# Altium PCB FS.PcbDoc
Units mil, origin at the board's own origin, x right, y up, seen from the top; angles counter-clockwise.
Board outline 5207.9 x 2647.9 mil, 2 copper layers (Top Layer, Bottom Layer); 27 components, 45 nets, 193 pads, 36 vias.
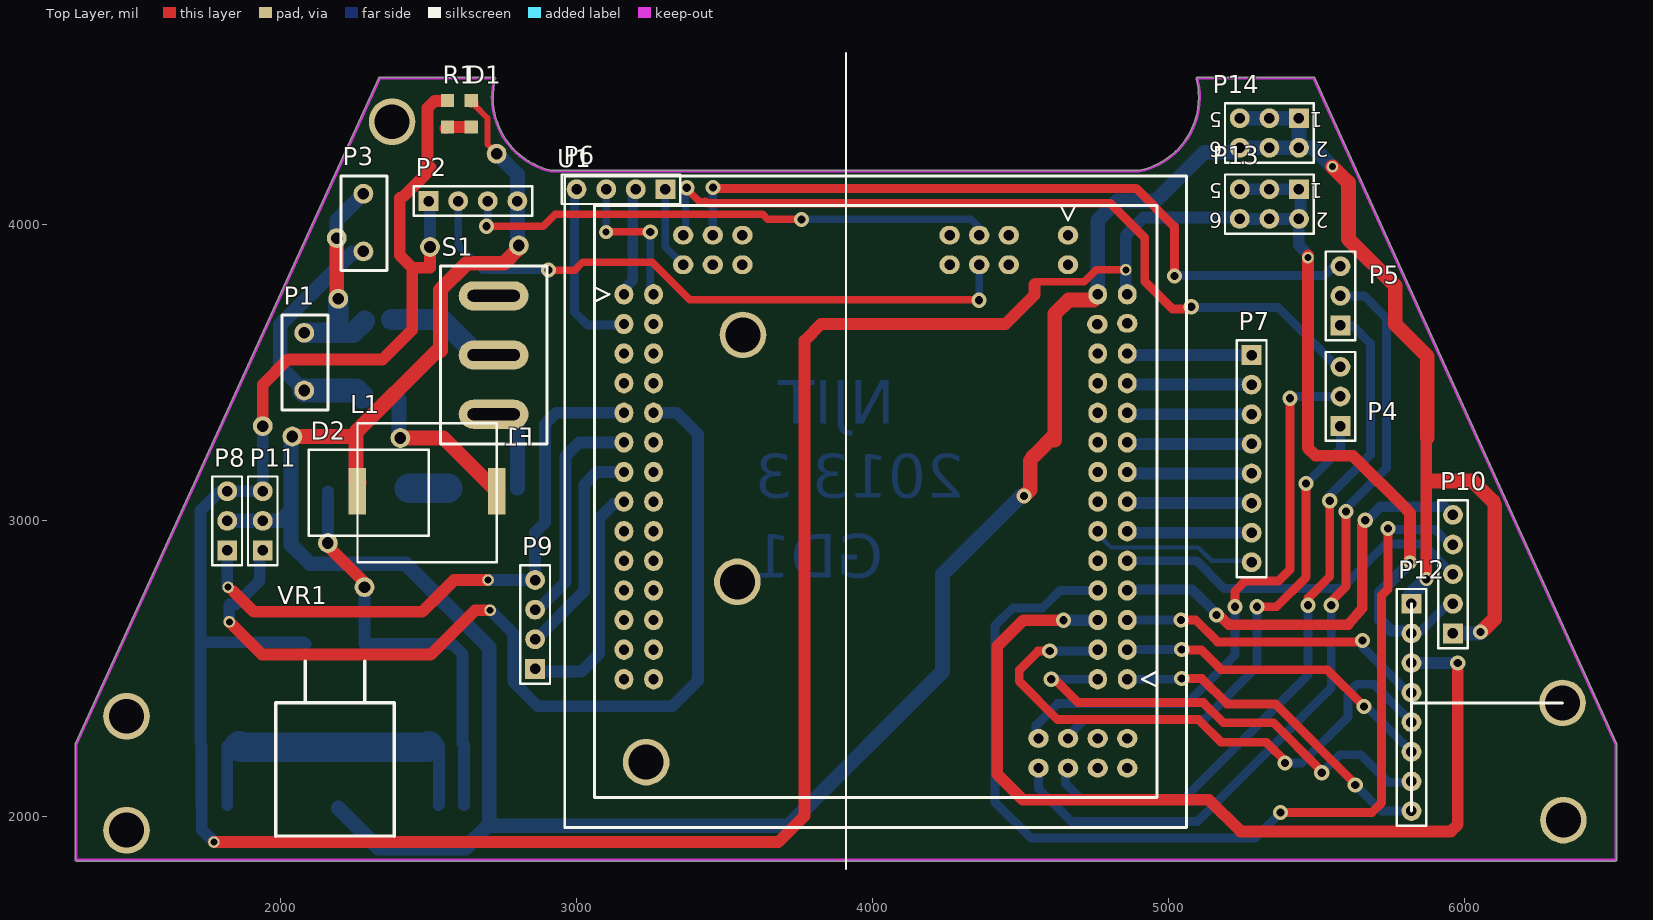
[diagram p0: Top Layer view]
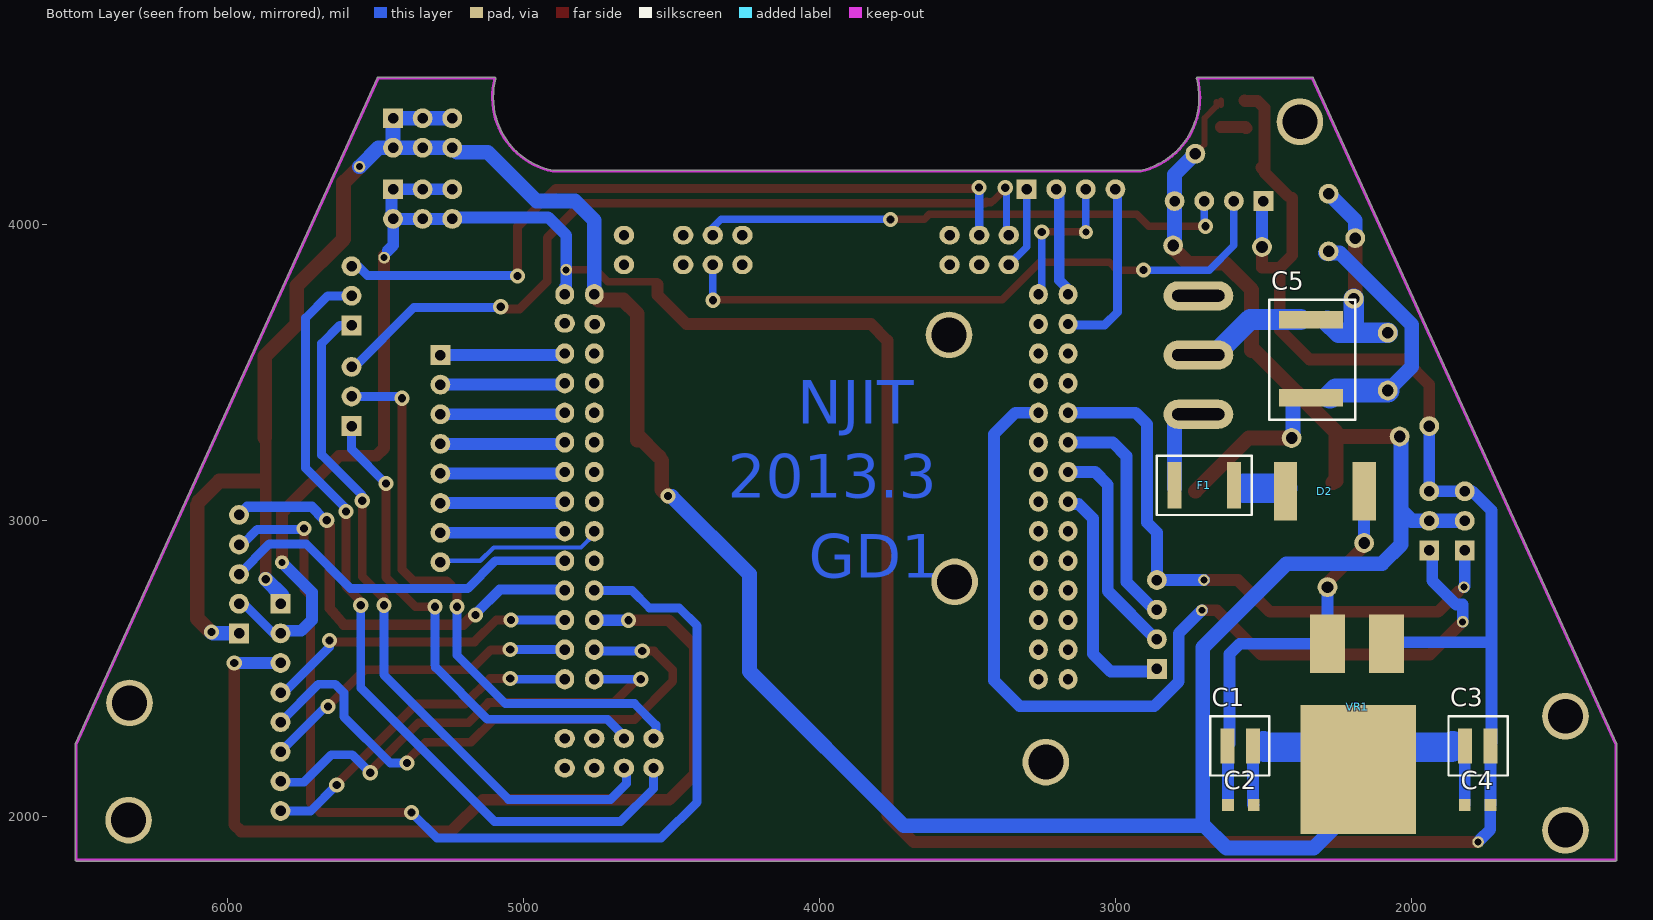
[diagram p1: Bottom Layer view, seen from below]

## Layer stack, top to bottom
Top Layer: signal copper 1.4
Dielectric: dielectric 12.6, FR-4, Dk 4.8
Bottom Layer: signal copper 1.4

## Board outline
1310,1851.05 cw(c1310,1855) 1306.05,1855 1306.05,2245 cw(c1310,2245) 1306.4,2246.64 2331.4,4496.64 cw(c2335,4495) 2335,4498.95 2721.67,4498.95 cw(c2721.67,4495) 2724.74,4497.49 cw(c2722.26,4494.41) 2726.21,4494.41 cw(c2722.26,4494.41) 2726.08,4493.42 ccw(c2970,4430) 2915.43,4183.95 4899.61,4183.95 ccw(c4850,4430) 5101,4430 ccw(c4850,4430) 5092.93,4493.15 cw(c5096.75,4494.15) 5096.75,4498.11 5487.56,4498.11 cw(c5490,4495) 5493.6,4496.63 6513.59,2246.64 6513.6,2246.63 6513.59,2246.64 cw(c6510,2245) 6513.95,2245 6513.95,1855 cw(c6510,1855) 6510,1851.05

## Design rules (kind name [scope] priority, off if disabled: settings)
Clearance [All] p1: gap=10
ComponentClearance [All] p1: gap=10 collisioncheckmode=3 verticalgap=0
PolygonConnect [All] p1: connectstyle=Relief reliefconductorwidth=10 reliefentries=4 polygonreliefangle="90 Angle"
RoutingVias [All] p1: holewidth=28 width=50 viastyle="Through Hole" minholewidth=28 minwidth=50 maxholewidth=28 maxwidth=50
SolderMaskExpansion [All] p1: expansion=4
TestPointUsage [All] p1: valid=0 allowmultiple=FALSE
Testpoint [All] p1: side=15 testpointundercomponent=TRUE minsize=40 maxsize=100 preferedsize=60 minholesize=0 maxholesize=40 preferedholesize=32 testpointgrid=1 style=1023 order=0123456789
Width [All] p1: maxlimit=100 minlimit=10 preferedwidth=40
18 further rules are at their usual default settings.

## Components (designator, comment, footprint, x,y, rotation, side; value= is the part's Value field where it differs from the comment)
C1 "Cap" 22uF钽电容 2580,2240 r0 bottom
C2 "Cap" 10uF的钽电容 2533,2040 r0 bottom
C3 "Cap" 22uF钽电容 1775,2240 r180 bottom
C4 "Cap" 10uF的钽电容 1820,2040 r180 bottom
C5 "Cap" 47UF钽电容 2340,3416.22 r90 bottom
D1 "LED0" 0805 2644,4330 r90 top
D2 "2A 60V" 470uF钽电容 2425.75,3100 r180 top
F1 "Fuse 1" FUSE 2800,3120 r180 bottom
L1 "Inductor" INDUCTOR 2730,3100 r180 top
P1 "Header 2H" 端子 2080,3530 r90 top
P2 "Header 4" HDR1X4 2500,4080 r0 top
P3 "Header 2" 端子 2280,4000 r90 top
P4 "Header 3" HDR1X3 5580,3320 r90 top
P5 "Header 3" HDR1X3 5580,3660 r90 top
P6 "Header 4" HDR1X4 3300,4120 r180 top
P7 "Header 8" HDR1X8 5280,3560 r270 top
P8 "Header 3" HDR1X3 1820,2900 r90 top
P9 "Header 4" HDR1X4 2860,2500 r90 top
P10 "Header 5" HDR1X5 5960,2620 r90 top
P11 "Header 3" HDR1X3 1940,2900 r90 top
P12 "Header 8" HDR1X8 5820,2720 r270 top
P13 "Header 3X2" HDR2X3 5440,4120 r180 top
P14 "Header 3X2" HDR2X3 5440,4360 r180 top
R1 "Res2" 0805 2564,4420 r270 top
S1 "SW-SPDT" Rockey_Switch 2720,3560 r270 top
U1 "MC9S12XS128" XS128A 3980,3060 r270 top
VR1 "LM2940S" LM2940 2083.94,2585 r0 top

## Footprints (in the part's own frame and the unit in brackets; to place one, negate y for a bottom-side part, rotate by r counter-clockwise, add the part's x,y. Pads: shape width x height; smd on the part's side, far side on the other; paste and mask are expansions set on the pad)
10uF的钽电容 [mm]
  rect 1x1 smd: 1(0,0) 2(2.21,0)
22uF钽电容 [mm]
  rect 1.2x3 smd: 1(-1.143,0) 2(1.067,0)
  silkscreen extent -2.54,-2.54 2.54,2.54
47UF钽电容 [mm]
  rect 1.5x5.5 smd: 1(0,0) 2(6.7,0)
  silkscreen extent -1.91,-3.81 8.38,3.56
470uF钽电容 [mm]
  rect 2x5 smd far side: 1(0,0) 2(6.75,0)
  silkscreen extent -1.91,-3.56 8.38,3.81
0805 [mil]
  rect 45x45 smd: 1(0,0) 2(90,0)
FUSE [mm]
  rect 1.2x4 smd: 1(0,0) 2(5.08,0)
  silkscreen extent -1.52,-2.54 6.6,2.54
HDR1X3 [mm] "Connector; Header; 3 Position"
  rect 1.7x1.7 hole 0.9: 1(0,0)
  round 1.7 hole 0.9: 2(2.54,0) 3(5.08,0)
  silkscreen extent -1.27,-1.27 6.35,1.27
HDR1X4 [mm] "Connector; Header; 4 Position"
  rect 1.7x1.7 hole 0.9: 1(0,0)
  round 1.7 hole 0.9: 2(2.54,0) 3(5.08,0) 4(7.62,0)
  silkscreen extent -1.27,-1.27 8.89,1.27
HDR1X5 [mm] "Connector; Header; 5 Position"
  rect 1.7x1.7 hole 0.9: 1(0,0)
  round 1.7 hole 0.9: 2(2.54,0) 3(5.08,0) 4(7.62,0) 5(10.16,0)
  silkscreen extent -1.27,-1.27 11.43,1.27
HDR1X8 [mm] "Connector; Header; 8 Position"
  rect 1.7x1.7 hole 0.9: 1(0,0)
  round 1.7 hole 0.9: 2(2.54,0) 3(5.08,0) 4(7.62,0) 5(10.16,0) 6(12.7,0) 7(15.24,0) 8(17.78,0)
  silkscreen extent -1.27,-1.27 19.05,1.27
HDR2X3 [mm] "Connector; Header; 3x2 Position"
  rect 1.7x1.7 hole 0.9: 1(0,0)
  round 1.7 hole 0.9: 2(0,2.54) 3(2.54,0) 4(2.54,2.54) 5(5.08,0) 6(5.08,2.54)
  silkscreen extent -1.27,-1.27 6.35,3.81
INDUCTOR [mm]
  rect 1.5x4 smd: 1(0,0) 2(11.938,0)
  silkscreen extent 0,-5.84 11.94,6.1
LM2940 [mm]
  rect 3x5 smd far side: 1(5.08,0) 3(0,0)
  rect 9.924x11.07 smd far side: 2(2.44,-10.795)
  silkscreen extent -2.54,-16.51 7.62,-1.52
Rockey_Switch [mm]
  oval 2.5x6 hole 1 slot 4.5 at 90 deg: 1(-5.08,0) 2(0,0) 3(5.08,0)
  silkscreen extent -7.62,-4.57 7.62,4.57
XS128A [mil]
  oval 68.9x62.99 hole 35: 1(-705,-820) 2(-705,-720) 3(-605,-820) 4(-605,-720) 6(-505,-720) 8(-405,-720) 9(-305,-820) 10(-305,-720) 11(-205,-820) 12(-205,-720) 13(-105,-820) 14(-105,-720) 15(-5,-820) 16(-5,-720) 17(95,-720) 18(95,-820) 19(195,-820) 20(195,-720) 21(295,-820) 22(295,-720) 23(395,-820) 24(395,-720) 25(495,-820) 26(495,-720) 27(595,-820) 28(595,-720) 45(595,880) 46(595,780) 47(495,880) 48(495,780) 49(395,880) 50(395,780) 51(295,880) 52(295,780) 53(195,880) 54(195,780) 55(95,880) 56(95,780) 57(-5,880) 58(-5,780) 59(-105,880) 60(-105,780) 61(-205,880) 62(-205,780) 63(-305,880) 64(-305,780) 65(-405,880) 66(-405,780) 67(-505,880) 68(-505,780) 69(-705,880) 70(-705,780) " 5"(-505,-820) " 7"(-405,-820)
  oval 62.99x68.9 hole 35: 37(895,580) 38(795,580) 39(895,680) 40(795,680) 41(895,780) 42(795,780) 43(895,880) 44(795,880) 71(-805,480) 72(-905,480) 73(-805,380) 74(-905,380) 75(-805,280) 76(-905,280) 89(-805,-420) 90(-905,-520) 91(-805,-520) 92(-905,-620) 93(-805,-620) 201(-905,680) 202(-805,680) 223(-905,-420) 325(-607,880) 326(-604,779)
  silkscreen extent -1105,-1020 1095,1080
端子 [mm]
  round 1.7 hole 1: 1(-2.286,0) 2(2.667,0)
  silkscreen extent -3.94,-2.03 4.19,1.91

## Part data
C1 C2 C3 C4 C5: "Capacitor"
D1: "Typical INFRARED GaAs LED"
D2: library part "Diode 1N4934", "1 Amp Fast Recovery Rectifier"
F1: "2A"
P1: "Header, 2-Pin, Right Angle"
P2 P6 P9: "Header, 4-Pin"
P3: "Header, 2-Pin"
P4 P5 P8 P11: "Header, 3-Pin"
P7 P12: "Header, 8-Pin"
P10: "Header, 5-Pin"
P13 P14: library part "Header 3", "Header, 3-Pin"
R1: "Resistor"
S1: "SPDT Subminiature Toggle Switch, Right Angle Mounting, Vertical Actuation"
VR1: library part "Volt Reg", "Voltage Regulator"

## Free pads (board coordinates)
  round 39.37 hole 23.62: 0(1775,1915) 2(4855,3848) 37(2701,2800) 38(2708,2698) 39(1823,2776) 40(1827,2659) 43(5553,4196) 44(5470,3889)
  round 66.93 hole 39.37: 0(1940,3320) 0(2040,3285) 1(2405,3280) 1(2505,3925) 2(2160,2925) 2(2730,4240) 3(2283.94,2776.06) 3(2805,3930) 4(2195,3750) 5(2190,3955)
  round 47.24 hole 23.62: 0(3100,3975) 42(5815,2860)
  round 157.48 hole 118.11: 46(2377,4348) 47(1480,1955) 49(3235,2185) 50(1480,2340) 51(3543,2794) 51(3562,3628) 51(6330,2385) 51(6333,1989)

## Via types
v1: diameter 51.18, hole 27.56, Top Layer to Bottom Layer, 33 vias
v2: diameter 51.18, hole 27.6, Top Layer to Bottom Layer, 2 vias
v3: diameter 47.24, hole 27.6, Top Layer to Bottom Layer, 1 vias

## Nets (pads, with @x,y where several pads share a name; then routed paths per layer and width w, separated by ;. In a path a pad name is that pad's centre, name@x,y a point inside that pad or via, vN(x,y) a via of type N, cw(c..) or ccw(c..) an arc to the next point about the centre after c; other vN are vias at no path point)
5V: C3.2 C4.2 P2.1 P8.3 P10.2 P11.3 P12.2 P13.1 P13.2 P13.3 P13.4 P13.5 P13.6 pad.0@1775,1915 pad.0@1940,3320 pad.1@2505,3925 pad.2@4855,3848 pad.42 pad.44 R1.1 U1.69 VR1.3 | length 11671.7
  Top Layer w25: 4547,3808 4715,3808 4755,3848 pad.2@4855,3848
  Top Layer w40: pad.0@1775,1915 3681,1915 3770,2004 3770,3609 3826,3665 4449,3665 4547,3763 4547,3798 ; pad.0@1940,3320 1940,3460 2025,3545 2345,3545 2445,3645 2445,3845 2455,3855 ; 2403,4090 2403,3897 2445,3855 2455,3855 ; 2416,4097 2497,4178 2497,4183 ; pad.1@2505,3915 2505,3855 2455,3855 ; 2507,4193 2497,4183 ; R1.1 2562,4418 2520,4418 2497,4395 2497,4183 ; pad.44@5470,3896 pad.44 5470,3246 5496,3220 5622,3220 5807,3035 ; pad.42 5815,3027
  Bottom Layer w30: P12.2 5844,2620 5952,2728 P10.2@5956,2732
  Bottom Layer w40: C3.2@1730,2250 1730,3035 1795,3100 P8.3 P11.3 pad.0@1940,3310 ; C4.2 C3.2 ; C4.2@1734,2046 1734,2040 1734,1957 pad.0@1769.01,1921.99 ; 1740,2590 2078.94,2590 VR1.3 ; P2.1 2505,4075 pad.1@2505,3925 ; U1.69@4860,3760 U1.69 U1.69@4860,3769 ; U1.69@4860,3790 U1.69@4860,3769 ; P13.6@5235,4025 4916,4025 4855,3964 4855,3848 4855,3774 U1.69@4860,3769 ; P13.6 P13.4 P13.2 P13.2@5445,4025 ; P13.5 P13.3 P13.1 ; P13.1@5445,4115 P13.2@5445,4025 ; 5457,3913 5439,3931 5439,4014 5442.5,4017.5 5445,4020 P13.2@5445,4025 ; P12.2@5814,2629 5750,2629 5714,2665 5714,2759 pad.42 pad.42@5817,2862
7.2V: C5.2 P1.2 P3.2 pad.4 pad.5 S1.2 | length 1079.1
  Top Layer w50: pad.5 2190,3755 pad.4 ; P3.2@2278.97,4106.03 P3.2@2280,4107.05
  Bottom Layer w50: pad.5 2190,4015 P3.2
  Bottom Layer w70: P1.2 2195,3635 ; pad.4 2195,3635 ; C5.2@2285,3675 2245,3635 2195,3635 ; C5.2@2375,3680 2545,3680 S1.2@2670,3555
AD0: P10.3 U1.53 | length 1259.7
  Bottom Layer w30: U1.53 5094,2865 5188,2771 5583,2771 5734,2922 5858,2922 P10.3 P10.3@5944,2820
AD1: P7.7 U1.55 | length 420
  Bottom Layer w40: U1.55@4860,2960 P7.7
AD2: P7.6 U1.57 | length 420
  Bottom Layer w40: U1.57@4860,3060 P7.6
AD3: P7.5 U1.59 | length 430
  Bottom Layer w40: U1.59@4850,3160 4860,3160 P7.5
AD4: P7.4 U1.61 | length 420
  Bottom Layer w40: U1.61@4860,3260 P7.4
AD5: P7.3 U1.63 | length 420
  Bottom Layer w40: U1.63@4860,3360 P7.3
AD6: P7.2 U1.65 | length 420
  Bottom Layer w40: U1.65@4860,3460 P7.2
AD7: P7.1 U1.67 | length 420
  Bottom Layer w40: U1.67@4860,3560 P7.1
AD9: P7.8 U1.56 | length 564.4
  Bottom Layer w15: U1.56@4760,2960 4760,2955 4805,2910 5100,2910 5145,2865 5275,2865 P7.8
AD15: U1.68
GND: C1.1 C2.1 C3.1 C4.1 D1.2 L1.2 P2.4 P8.2 P10.1 P11.2 P12.1 P14.1 P14.2 P14.3 P14.4 P14.5 P14.6 pad.0@2040,3285 pad.2@2730,4240 pad.3@2805,3930 pad.43 U1.70 VR1.2 | length 12646.7
  Top Layer w15: D1.2@2642,4421 2644,4421 D1.2@2646,4421
  Top Layer w20: D1.2@2644,4405 D1.2 ; D1.2@2659,4415 2659,4400 2698.97,4360.03 2698.97,4271.03 pad.2@2730,4240
  Top Layer w40: v3(5870,2803) 5870,3277.9 5873,3280.9
  Top Layer w50: pad.0@2040,3285 2250,3285 2255,3280 ; L1.2@2255,3135 L1.2@2255,3140 ; L1.2@2265,3130 L1.2@2255,3140 ; 2530,3575 2255,3300 2255,3280 ; 2540,3575 2540,3780 2630,3870 2755,3870 pad.3@2800,3915 ; v1(4511,3084) 4532,3105 4532,3202 ; 4542,3217 4615,3290 ; 4615,3272 4615,3290 ; U1.70@4760,3760 4746,3746 4662,3746 4615,3699 4615,3290 ; pad.43 5600,4149 ; 5607,4142.61 5607,3952.08 5765,3794.08 5765,3663.84 5873,3555.84 5873,3280.9 ; 5883,3136 5884.86,3134.14 6027,3134.14 6095,3066.14 6095,3066 ; v1@6060,2629 6101,2670 6101,3052.9 ; L1.2@2255,3140 2255,3280
  Bottom Layer w40: C4.1 C3.1 ; C2.1 2535,2042 C1.1
  Bottom Layer w50: P8.2 P11.2 2000,3000 2035,3035 ; pad.0@2040,3285 2035,3280 2035,3035 ; VR1.2@2195,2030 2330,1895 2625,1895 2705,1975 2705,2572 2422,2855 2100,2855 2035,2920 2035,3035 ; 2716,1970 3715,1970 4236,2491 4236,2820 v1@4498,3082 ; pad.2@2730,4240 2800,4170 P2.4 2800,3935 pad.3@2805,3930 ; U1.70@4760,3760 U1.70 4760,4015 4825,4080 4955,4080 5120,4245 5225,4245 P14.6 P14.4 P14.2 ; P14.5 P14.3 P14.1 P14.2 ; pad.43 5489,4260 P14.2 ; P12.1@5815,2734 5815,2748 v3(5870,2803) ; P10.1 6049,2620 v1(6053,2624)
  Bottom Layer w100: 1860,2240 1865,2235 2180,2235 2495,2235 2500,2240
NetD1_1: D1.1 R1.2 | length 97.3
  Top Layer w40: D1.1 R1.2 ; R1.2 2560,4326 2557,4326 2561,4330 R1.2
NetD2_1: D2.1 F1.2 | length 130
  Bottom Layer w100: D2.1@2435,3110 2565,3110
NetF1_1: F1.1 S1.3 | length 256.2
  Bottom Layer w50: S1.3@2785,3360 2800,3345 F1.1 F1.1@2800,3110
PA0: P12.8 U1.45 | length 1136.9
  Top Layer w30: v1(5044,2467) 5112,2467 5197,2382 5360,2382 v1@5631,2111
  Bottom Layer w30: U1.45 v1@5036,2465 ; v1(5630,2108) 5718,2020 P12.8
PA1: P12.7 U1.46 | length 1568.1
  Top Layer w30: v1(4603,2465) 4615,2465 4694,2386 5117,2386 5185,2318 5354,2318 v1@5512,2160
  Bottom Layer w30: v1(4603,2465) U1.46 ; v1(5517,2149) 5578,2210 5648,2210 5741,2117 5820,2117 P12.7@5829,2117
PA2: P12.6 U1.47 | length 1081.5
  Top Layer w30: v1@5053,2564 5110,2564 5177,2497 5536,2497 v1(5660,2373)
  Bottom Layer w30: U1.47 v1@5032,2565 ; v1(5660,2373) 5667,2373 P12.6
  other v1: 5044,2565
PA3: P12.5 U1.48 | length 1987.9
  Top Layer w30: v1(4598,2560) 4559,2560 4495,2496 4495,2458 4624,2329 5100,2329 5177,2252 5330,2252 v1@5396.5,2185.5
  Bottom Layer w30: v1(4598,2560) 4760,2560 U1.48@4767,2560 ; v1(5393,2182) 5449,2182 5606,2339 5606,2419 5635,2448 5692,2448 P12.5
PA4: P12.4 U1.49 | length 1070.3
  Top Layer w30: v1(5042,2665) 5091,2665 5165,2591 v1@5649,2591
  Bottom Layer w30: U1.49 v1(5042,2665) ; v1(5655,2596) 5655,2573 5814,2414 P12.4@5816,2412
PA5: P12.3 U1.50 | length 3154.3
  Top Layer w40: v1(4645,2664) 4509,2664 4421,2576 4421,2144 4507,2058 5136,2058 5243,1951 5953,1951 5976,1974 v1(5976,2520)
  Bottom Layer w40: v1(4645,2664) 4759,2664 U1.50 ; P12.3 v1(5976,2520)
PA6: P10.5 U1.51 | length 1495.9
  Top Layer w35: v2@5168,2681 5170,2681 5202,2649 5606,2649 5654,2705 5654,2983 v2@5664.55,3001.69
  Bottom Layer w35: U1.51@4850,2768 4860,2768 5080,2768 v2@5158,2690 ; v2@5657,3006 5664,3006 5674,3006 5715,3047 5933,3047 P10.5
  other v2: 5161,2682 5664,3002
PA7: P10.4 U1.52 | length 3572.4
  Top Layer w30: v1(5378,2015) 5686,2015 5719,2048 5719,2748 5741,2770 v1(5741,2974)
  Bottom Layer w30: U1.52 4633,2765 4573.63,2705.63 4473.63,2705.63 4413,2645 4413,2050 4534,1929 5292,1929 v1(5378,2015) ; v1@5741,2971 5898,2971 5949,2920 P10.4
PGND: C5.1 L1.1 P1.1 P3.1 pad.1@2405,3280 | length 1391.5
  Top Layer w50: pad.1@2405,3280 2550,3280 L1.1
  Bottom Layer w50: P1.1@2070,3440 P1.1 1999.4,3520.6 1999.4,3661.9 2242.5,3905 2280,3905 P3.1@2290,3905 ; C5.1@2400,3410 2400,3285 pad.1@2405,3280
  Bottom Layer w80: P1.1 2255,3440 C5.1@2275,3420
PH0: P4.1 U1.40 | length 1701.2
  Top Layer w30: v1(5298,2710) 5364,2710 5464,2810 v1(5464,3126)
  Bottom Layer w30: U1.40 4660,2274 4716,2330 5121,2330 5296,2505 ; 5298,2515 v1(5298,2710) ; v1(5464,3126) 5580,3242 P4.1
PH1: P5.1 U1.39 | length 2365.1
  Top Layer w30: v1(5471,2715) 5471,2739 5544,2812 v1(5544,3068)
  Bottom Layer w30: U1.39@4651,2167 4651,2165 4651,2113 4705,2059 5050,2059 5471,2480 v1(5471,2715) ; v1(5544,3068) 5544,3086 5681,3223 5681,3599 5620,3660 5617.94,3660
PH2: P4.2 U1.38 | length 2014
  Top Layer w30: v1(5224,2710) 5224,2762 5259,2797 5371,2797 5410,2836 v1(5410,3414)
  Bottom Layer w15: P4.2@5570,3410 P4.2
  Bottom Layer w30: U1.38@4552,2263 4552,2265 4552,2310 4625,2383 5061,2383 5224,2546 v1(5224,2710) ; v1(5410,3414) 5416,3420 P4.2
PH3: P5.2 U1.37 | length 2770.7
  Top Layer w30: v1(5549,2715) 5549,2729 5599,2779 v1(5599,3032)
  Bottom Layer w30: U1.37 4560,2096 4672,1984 5097,1984 5549,2436 v1(5549,2715) ; v1(5599,3032) 5599,3042 5735,3178 5735,3685 5660,3760 P5.2@5613,3760
PP1: P6.4 U1.3 | length 617.8
  Bottom Layer w25: P6.4@2993,4120 P6.4@2993,4125
  Bottom Layer w30: P6.4@2993,4125 2993,4120 2993,3705 3036,3662 3160,3662 U1.3@3168,3662
PP2: P6.3 pad.0@3100,3975 U1.2 | length 517
  Top Layer w25: pad.0@3100,3975 3101,3976 v1(3249,3976)
  Bottom Layer w25: P6.3@3092,4120 P6.3@3092,4127 ; pad.0@3100,3975 P6.3 ; v1(3249,3976) 3249,3776 U1.2
PP3: P6.2 U1.1 | length 359.2
  Bottom Layer w35: U1.1@3156,3779 3190,3813 3190,4110 P6.2
PP4: P6.1 U1.93 | length 301.8
  Bottom Layer w25: P6.1@3296,4116 P6.1 3300,3925 U1.93 U1.93@3360,3870
  Bottom Layer w30: P6.1@3302,4120 P6.1@3302,4127 ; U1.93@3365,3870 U1.93@3368,3867
PP5: P4.3 U1.92 | length 2696.8
  Top Layer w25: v1(3372,4125) 3372,4121 3412,4081
  Top Layer w30: 3421,4076 3436,4076 ; 3436,4077 3440.5,4072.5 4802.5,4072.5 4919,3956 4919,3809 5013,3715 5076,3715 v1@5080,3715
  Bottom Layer w25: U1.92@3368,3962 3368,3965 v1@3368,4121
  Bottom Layer w30: v1@5089,3721 5369,3721 5575,3515 5577,3513 5580,3513 P4.3@5585,3513
  other v1: 5076,3723
PP7: P5.3 U1.90 | length 2486.4
  Top Layer w30: v1@3478,4123 4890,4123 5019,3994 v1(5019,3827)
  Bottom Layer w30: U1.90 3460,4116 3465.5,4121.5 v1@3470,4126 ; v1@5033,3829 5527,3829 5558,3860 P5.3
  other v1: 3461,4126
PS0: P2.2 U1.73 | length 2105.3
  Top Layer w25: v1(2905,3847) 2994,3847 3020,3873 3256,3873 3382,3747 v1@4339,3747
  Bottom Layer w25: P2.2 2600,3930 2683,3847 v1(2905,3847) ; v1@4360,3746 U1.73
  other v1: 4359,3745
PS1: P2.3 U1.74 | length 1818.3
  Top Layer w25: v1(2696,3995) 2888,3995 2928,4035 3629,4035 3646,4018 v1(3760,4018)
  Bottom Layer w25: v1@2700,3999 P2.3 ; v1(3760,4018) 3761,4019 4332,4019 4364,3987 4364,3965 U1.74@4364,3955
PS2: U1.75
PS3: U1.76 | length 20
  Bottom Layer w30: U1.76@4250,3963 4260,3963 U1.76@4270,3963
PT0: P8.1 P9.4 pad.37 pad.39 U1.9 | length 2040
  Top Layer w40: 1841,2762 1910,2693 2478,2693 2509,2724 2510,2724 2586,2800 pad.37
  Bottom Layer w40: P8.1 1820,2779 pad.39 ; pad.37 P9.4 2860,2961 2893,2994 2893,3326 2932,3365 U1.9
PT1: P11.1 pad.38 pad.40 U1.10 | length 3270.1
  Top Layer w40: pad.40 1938,2548 2507,2548 2657,2698 pad.38
  Bottom Layer w40: pad.40 1827,2717 1849,2717 1930,2798 1930,2890 P11.1 ; pad.38 2786,2620 2786,2457 2869,2374 3323.5,2374 3410.5,2461 3410.5,3292.5 3338,3365 U1.10
PT2: P9.3 U1.11 | length 783
  Bottom Layer w40: P9.3 2869,2700 2963,2794 2963,3219 3009,3265 U1.11
PT4: P9.2 U1.13 | length 744.3
  Bottom Layer w40: P9.2 2863,2600 3026,2763 3026,3122 3069,3165 U1.13
PT6: P9.1 U1.15 | length 804.1
  Bottom Layer w40: P9.1@2855,2491 2860,2491 3016,2491 3076,2551 3076,3008 3125,3057 U1.15@3157,3057
V1: C1.2 C2.2 D2.2 pad.2@2160,2925 pad.3@2283.94,2776.06 VR1.1 | length 1431.8
  Top Layer w40: pad.2@2160,2925 2160,2915 2291.44,2783.56 pad.3@2295,2780
  Bottom Layer w40: pad.2@2160,2925 D2.2 ; pad.3@2280,2780 2283.94,2776.06 VR1.1 2580,2585 2615,2550 2615,2247 C1.2 2620,2238 C2.2
pads on no net: "U1. 5" "U1. 7" S1.1 U1.4 U1.6 U1.8 U1.12 U1.14 U1.16 U1.17 U1.18 U1.19 U1.20 U1.21 U1.22 U1.23 U1.24 U1.25 U1.26 U1.27 U1.28 U1.41 U1.42 U1.43 U1.44 U1.54 U1.58 U1.60 U1.62 U1.64 U1.66 U1.71 U1.72 U1.89 U1.91 U1.201 U1.202 U1.223 U1.325 U1.326
copper on no net: | length 42.7
  Bottom Layer w15: 3155,2555 3160,2555 3170,2555 ; 3160,2660 3170,2660 ; 3260,3155 3260,3160 ; 5577,3757 5580,3760 ; 5580,3660 5586,3654

## Keep-outs
Keep-Out Layer:
  lines w7.87: 2721.67,4495 2335,4495 1310,2245 1310,1855 3910,1855 6510,1855 6510,2245 5490,4495 ; 2722.26,4494.41 ccw(c2970,4430) 2915,4180 4900,4180 ccw(c4850,4430) 5096.75,4494.15 5489.15,4494.15

## Other copper
Bottom Layer:
  text "NJIT" at 4074,3328 h148.11
  text "2013.3" at 4310,3078 h148.11
  text "GD1" at 4035,2808 h148.11

## Silkscreen, mask and mechanical layers (free items; w line width, h text height)
Top Overlay:
  lines w7.87: 3910,1825 3910,4580 3910,4570
  lines w9.84: 5820,2020 5820,2720 ; 5820,2382 5820,2385 6330,2385

## Dimensions
5490,4580 to 4900,4530 on Top Overlay
2335,4535 to 2925,4535 on Top Overlay
2335,4495 to 2365,4180 on Top Overlay
6510,1855 to 6540,2250 on Top Overlay
1310,1855 to 1200,2250 on Top Overlay
3910,1715 to 6510,1760 on Top Overlay
3910,1825 to 1310,1835 on Top Overlay
3910,4580 to 3925,1855 on Top Overlay
2335,4495 to 5490,4495 on Top Overlay
2335,4660 to 3910,4570 on Top Overlay
5820,2020 to 5820,2720 on Top Overlay
6330,2385 to 5820,2420 on Top Overlay
6027,2020 to 6330,2385 on Top Overlay

## Text inside footprints (layer, text, board x,y; h text height)
P13: Top Overlay "6" at 5180,4040 h50 r180; Top Overlay "5" at 5180,4140 h50 r180; Top Overlay "2" at 5540,4040 h50 r180; Top Overlay "1" at 5520,4140 h50 r180
P14: Top Overlay "6" at 5180,4280 h50 r180; Top Overlay "5" at 5180,4380 h50 r180; Top Overlay "2" at 5540,4280 h50 r180; Top Overlay "1" at 5520,4380 h50 r180